# Altium PCB Electron_usinageESEO.PCBDOC
Units mil, origin at the board's own origin, x right, y up, seen from the top; angles counter-clockwise.
Board outline 3543.31 x 2755.91 mil, 2 copper layers (TopLayer, BottomLayer); 53 components, 39 nets, 173 pads, 31 vias.
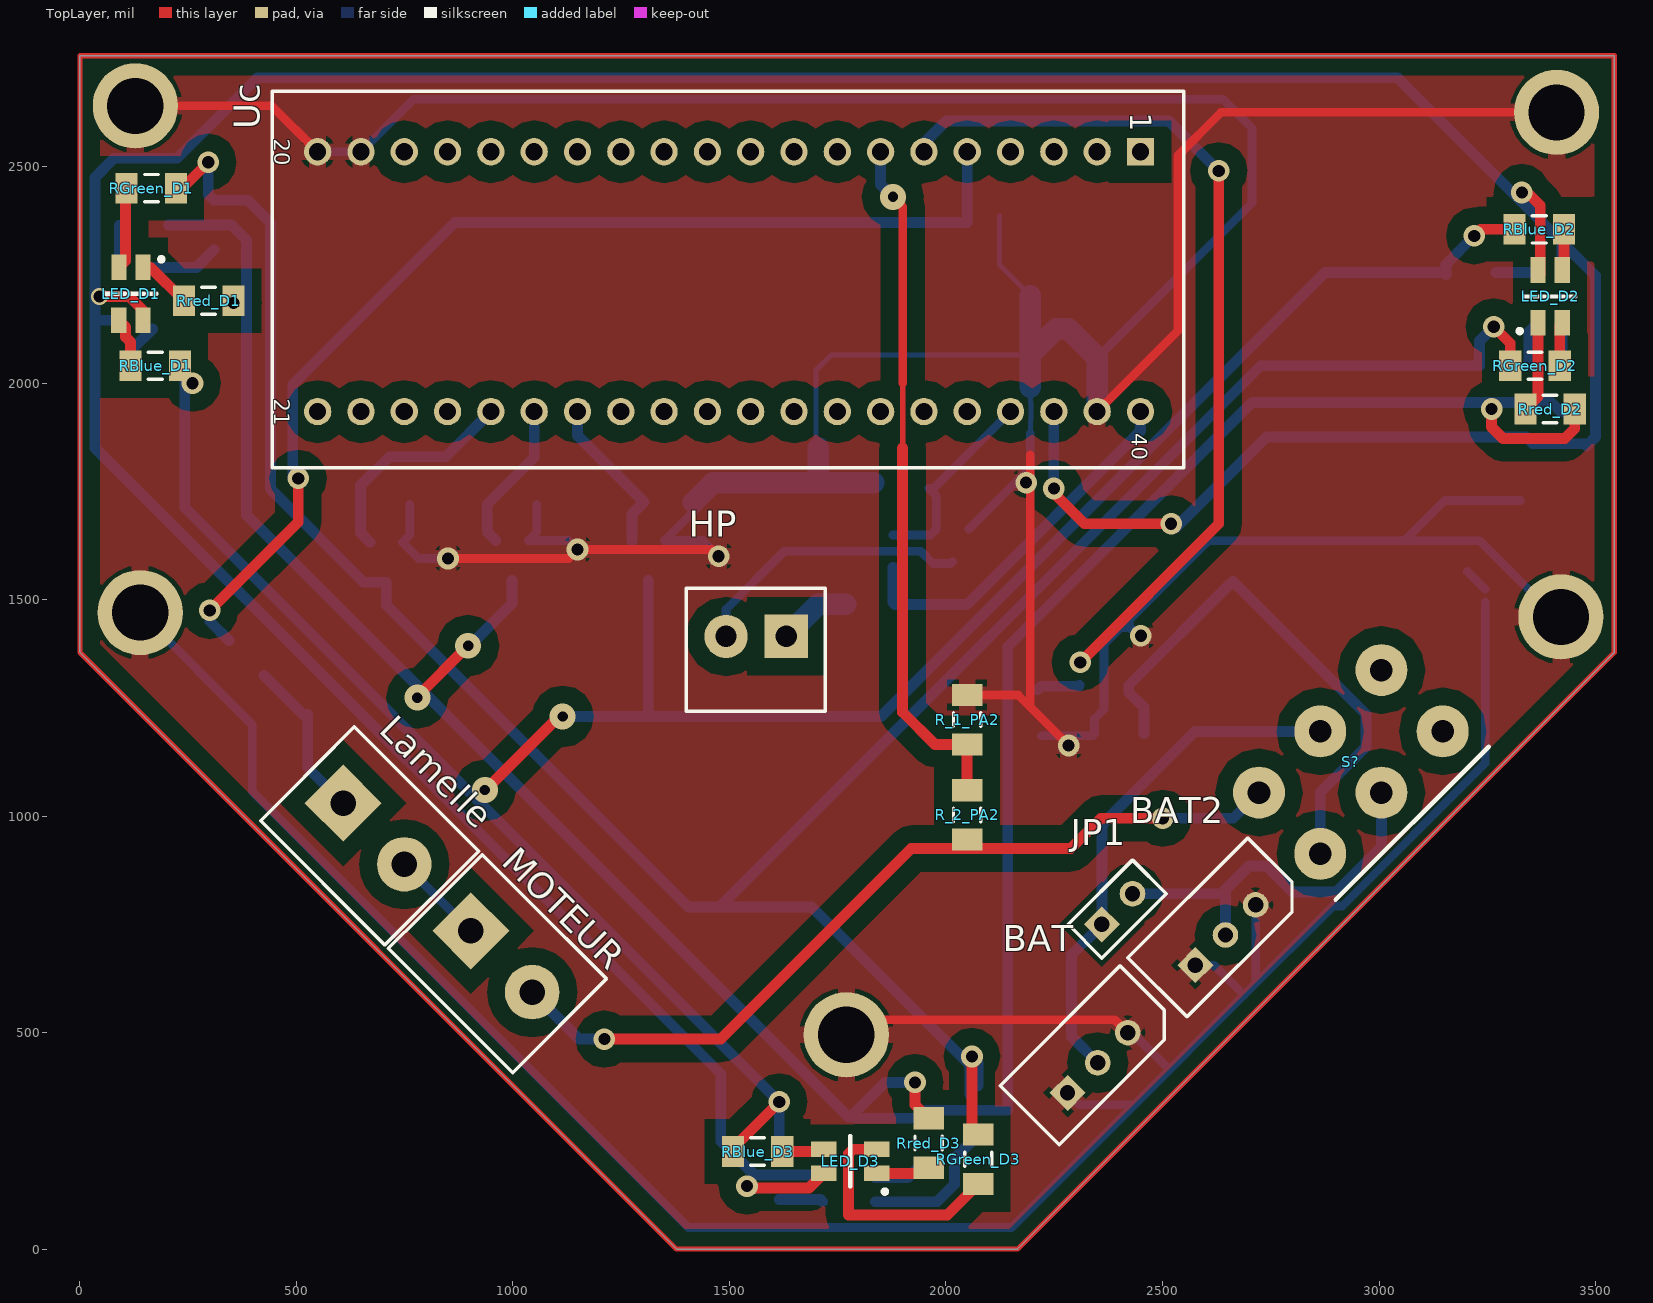
[diagram p0: TopLayer view]
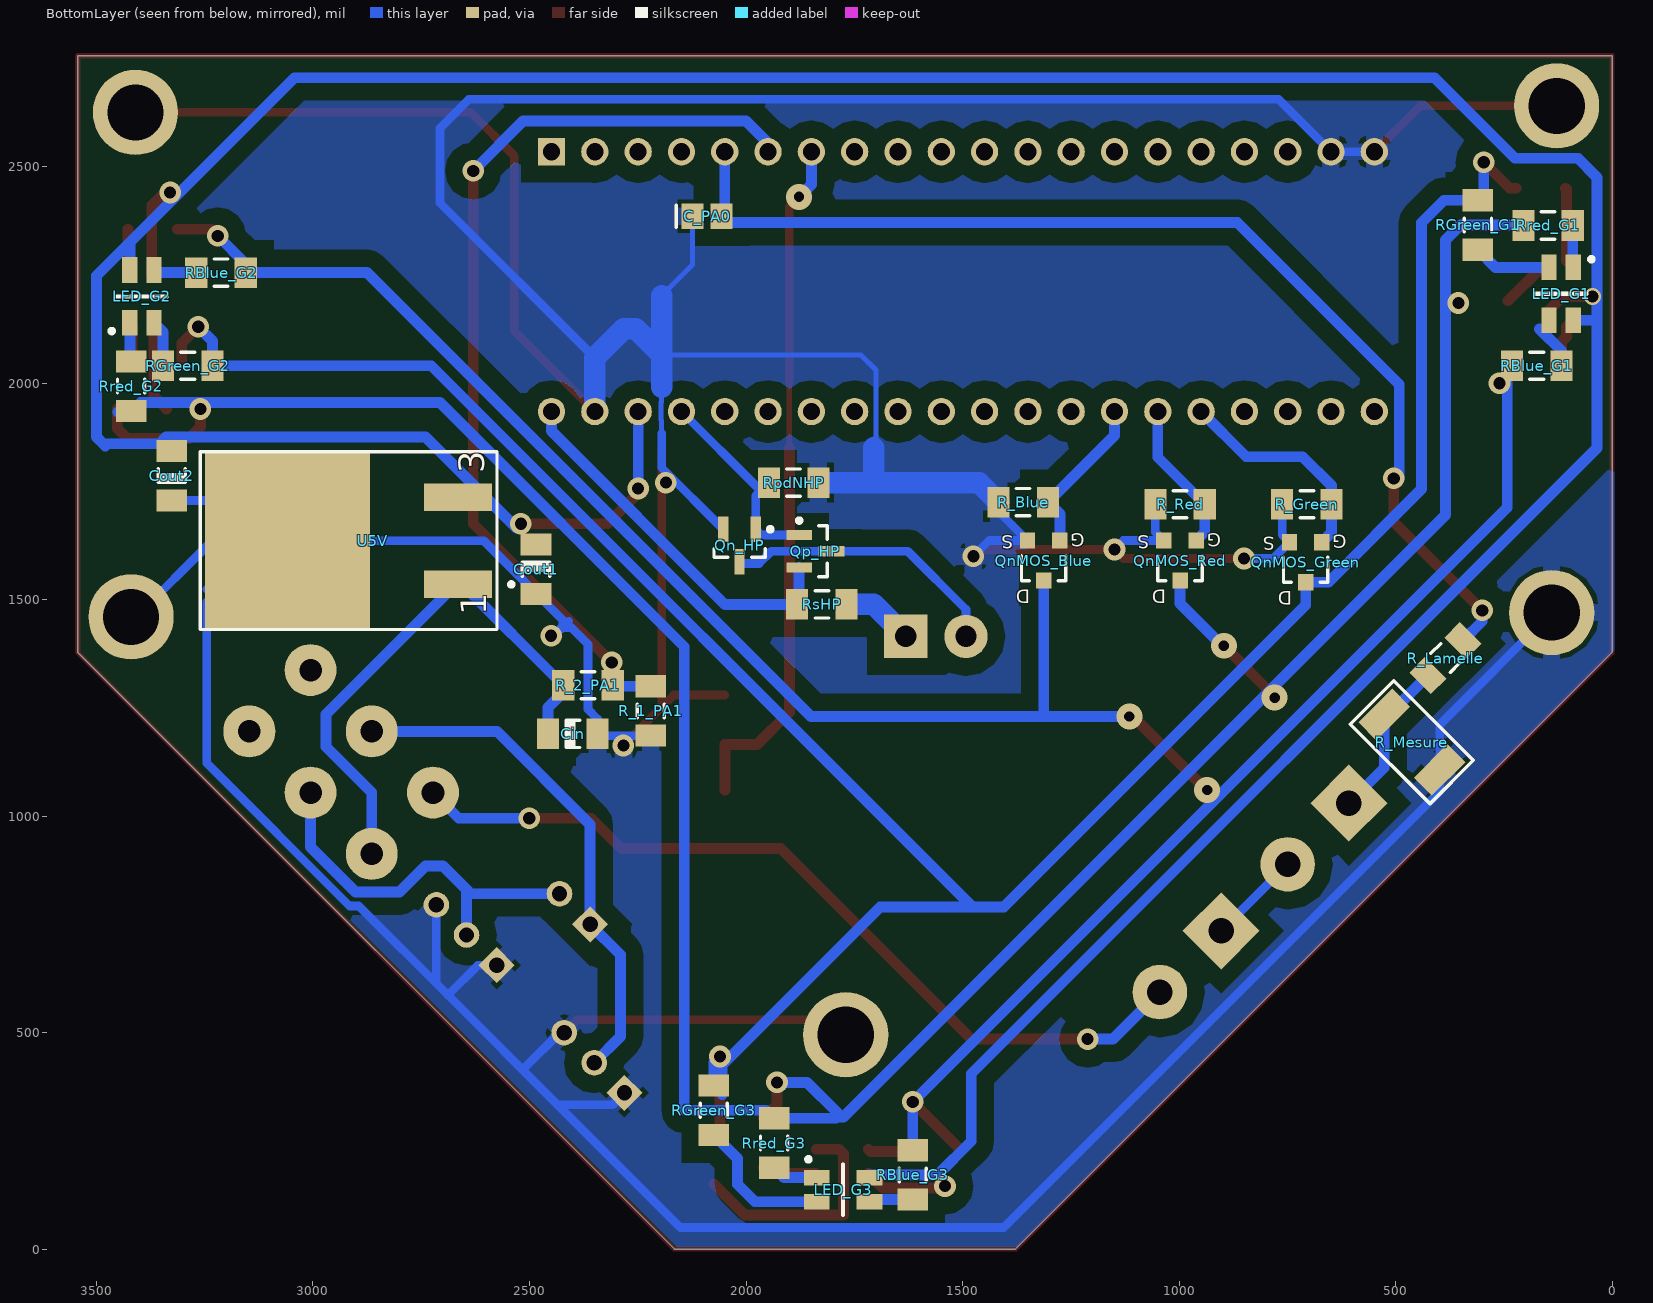
[diagram p1: BottomLayer view, seen from below]

## Layer stack, top to bottom
TopSolder: solder mask 0.4, Solder Resist, Dk 3.5
TopLayer: signal copper 1.4
Dielectric1: core 12.6, FR-4, Dk 4.8
BottomLayer: signal copper 1.4
BottomSolder: solder mask 0.4, Solder Resist, Dk 3.5

## Board outline
1377.95,0 0,1377.95 0,2755.91 3543.31,2755.91 3543.31,1377.95 2165.35,0

## Design rules (kind name [scope] priority, off if disabled: settings)
Clearance Clearance_1 [InNamedPolygon('BottomLayer-GND') Or  InNamedPolygon('TopLayer-GND')] p1: gap=40
Clearance PowerPlaneClearance [InNamedPolygon('Bot-GND') Or  InNamedPolygon('Top-GND')] p2: gap=40
Clearance [All] p3: gap=10
FabricationTestPointUsage TestPointUsage [All] p1: valid=0 allowmultiple=FALSE
FabricationTestpoint Testpoint [All] p1: side=3 testpointundercomponent=TRUE minsize=40 maxsize=100 preferedsize=60 minholesize=20 maxholesize=40 preferedholesize=32 testpointgrid=1 allowsidetop=TRUE allowsidebottom=TRUE usegrid=TRUE gridtolerance=0.01
Height [All] p1: minheight=0 maxheight=2000 prefheight=500
HoleSize [All] p1: absolutevalues=TRUE maxlimit=300 minlimit=1 maxpercent=80.000 minpercent=20.000
PlaneClearance [All] p1: clearance=40
PlaneConnect [All] p1: planeconnectstyle=Relief reliefexpansion=19.68 reliefentries=4 reliefconductorwidth=40 reliefairgap=19.68
PolygonConnect [All] p1: connectstyle=Relief reliefconductorwidth=40 reliefentries=4 polygonreliefangle="90 Angle" airgapwidth=10
RoomDefinition Electron [InComponentClass('Electron')] p1: confinementstyle=ConfineIn formatcopy=TRUE lockcomponents=FALSE outline -2655,7695 -1795,7695 -1795,8225 -2655,8225
RoutingVias [All] p1: holewidth=23.62 width=60 viastyle="Through Hole" minholewidth=23.62 minwidth=60 maxholewidth=23.62 maxwidth=60
SilkToSolderMaskClearance SilkscreenOverComponentPads [IsPad] p1: minsilkscreentomaskgap=10 clearancetoexposedcopper=TRUE
SolderMaskExpansion [All] p1: expansion=2
Width [All] p1: maxlimit=1000 minlimit=11 preferedwidth=40
22 further rules are at their usual default settings.

## Components (designator, comment, footprint, x,y, rotation, side; value= is the part's Value field where it differs from the comment)
BAT "MOLEX 22-03-5035" MOLEX3_2.5MM 2420,500 r225 top
BAT2 "MOLEX 22-03-5035" MOLEX3_2.5MM 2715,795 r225 top
C_PA0 "CMS_0805" C0805_N 2090,2385 r180 bottom
Cin "CONDENSATEUR_POL_ELECTROLY_RAD_2.0/5.08" C1206_N 2400,1190 r180 bottom
Cout1 "CONDENSATEUR_POL_ELECTROLY_RAD_2.0/5.08" C1206_N 2485,1570 r270 bottom
Cout2 "CONDENSATEUR_CER_RAD_5.08" C1206_N 3326.1,1786 r90 bottom
HP "BORNIER_2V_3.5MM" BORNIER_2V_3.5MM 1630,1415 r180 top
JP1 "JUMPER2" BARRETTE_2_M_D 2360,750 r45 top
Lamelle "BORNIER2 DROIT A VIS" BORNIER2_A_VIS 607.86,1030 r315 top
LED_D1 "150141M173100" 3528 118.09,2206.02 r270 top
LED_D2 "150141M173100" 3528 3394.9,2200 r90 top
LED_D3 "150141M173100" 3528 1778.98,202.85 r180 top
LED_G1 "150141M173100" 3528 117.99,2206.02 r270 bottom
LED_G2 "150141M173100" 3528 3395,2200 r90 bottom
LED_G3 "150141M173100" 3528 1775.87,137.4 r180 bottom
MOTEUR "BORNIER2 DROIT A VIS" BORNIER2_A_VIS 902.86,735 r315 top
Qn_HP "Transistor MOSFET-N" SOT23-3N 2015,1625 r270 bottom
QnMOS_Blue "TRANSISTOR_MOSFET-N_SOT23_GSD" TRANSISTOR_MOSFET-N_SOT23_GSD 1312.63,1590 r0 bottom
QnMOS_Green "TRANSISTOR_MOSFET-N_SOT23_GSD" TRANSISTOR_MOSFET-N_SOT23_GSD 707.63,1586.26 r0 bottom
QnMOS_Red "TRANSISTOR_MOSFET-N_SOT23_GSD" TRANSISTOR_MOSFET-N_SOT23_GSD 997.63,1590 r0 bottom
Qp_HP "Transistor MOSFET-P" SOT23-3N 1840,1611.66 r180 bottom
R_1_PA1 "RESISTANCE_CMS_1206" R1206_N 2220,1242.91 r90 bottom
R_1_PA2 "RESISTANCE_CMS_1206" R1206_N 2048.96,1222.69 r270 top
R_2_PA1 "RESISTANCE_CMS_1206" R1206_N 2365,1302.09 r0 bottom
R_2_PA2 "RESISTANCE_CMS_1206" R1206_N 2048.92,1002.69 r270 top
R_Blue "RESISTANCE_CMS_1206" R1206_N 1359.92,1725 r180 bottom
R_Green "RESISTANCE_CMS_1206" R1206_N 705,1720 r0 bottom
R_Lamelle "RESISTANCE_CMS_1206" R1206_N 385,1365 r135 bottom
R_Mesure "RESISTANCE_CMS_1206" INDUCTANCE_CMS_1812 390,1115 r45 bottom
R_Red "RESISTANCE_CMS_1206" R1206_N 997.63,1720.04 r0 bottom
RBlue_D1 "100" R1206_N 174.02,2040.04 r180 top
RBlue_D2 "100" R1206_N 3370,2355 r0 top
RBlue_D3 "100" R1206_N 1565,225.31 r0 top
RBlue_G1 "100" R1206_N 174.02,2040.04 r180 bottom
RBlue_G2 "100" R1206_N 3212.4,2255.04 r0 bottom
RBlue_G3 "100" R1206_N 1614.97,171.46 r270 bottom
RGreen_D1 "470" R1206_N 165,2450 r180 top
RGreen_D2 "470" R1206_N 3360.12,2040 r0 top
RGreen_D3 "470" R1206_N 2074.68,207.6 r270 top
RGreen_G1 "470" R1206_N 310,2365 r270 bottom
RGreen_G2 "470" R1206_N 3289.17,2040 r0 bottom
RGreen_G3 "470" R1206_N 2074.68,320.75 r270 bottom
RpdNHP "RESISTANCE_CMS_1206" R1206_N 1890,1770 r0 bottom
Rred_D1 "220" R1206_N 297.46,2190 r180 top
Rred_D2 "220" R1206_N 3395,1940 r180 top
Rred_D3 "220" R1206_N 1960,245 r270 top
Rred_G1 "220" R1206_N 147.85,2364.02 r180 bottom
Rred_G2 "220" R1206_N 3420,1992.91 r90 bottom
Rred_G3 "220" R1206_N 1935,245 r270 bottom
RsHP "RESISTANCE_CMS_1206" R1206_N 1825,1488.92 r0 bottom
S? "INTERRUPTEUR_BIPOLAIRE_COUDE_A_LEVIER" INTER_BIPOL_COUD_LEVIERGD 2935,1125 r315 top
U5V "Regulateur MC7805CD2T" "D2Pak (134)" 2665,1535.91 r90 bottom
Uc "STM32F103C8T6/PCB_DIP40" STM32F103C8T6_DIP40 2449.09,2534.09 r270 top

## Footprints (in the part's own frame and the unit in brackets; to place one, negate y for a bottom-side part, rotate by r counter-clockwise, add the part's x,y. Pads: shape width x height; smd on the part's side, far side on the other; paste and mask are expansions set on the pad)
3528 [mm] "Chip LED, 4-Leads, Body 2.8x3.5mm (max), Pitch 1.42mm, IPC Medium Density"
  rect 1.5x0.9 smd: 1(1.55,0.708) 2(1.55,-0.71) 3(-1.55,0.708) 4(-1.55,-0.708)
  silkscreen extent -2.15,-1.5 0.03,1.9, body extent -2.36,-2.22 2.37,2.22, height 1.87
BARRETTE_2_M_D [mm] "BARRETTE 2 CONTACTS ; 1 RANGEE ; DROITE ; MALE ; ESPACEMENT BROCHES = 2.54 mm"
  rect 1.5x1.5 hole 0.9: 1(0,0)
  round 1.5 hole 0.9: 2(2.54,0)
  silkscreen extent -1.4,-1.4 3.94,1.4, body extent -1.3,-1.2 3.78,1.3, height 8.55
BORNIER2_A_VIS [mm] "BORNIER 2 PLOTS A VIS ; VERTICAL ; ESPACEMENT BROCHES = 5.08mm"
  rect 3.2x3.2 hole 1.5: 1(0,0)
  round 3.2 hole 1.5: 2(5.08,0)
  silkscreen extent -2.69,-4.15 7.62,3.63, body extent -2.5,-4 7.5,3.5, height 10
BORNIER_2V_3.5MM [mm]
  rect 2.54x2.54 hole 1.25: 1(-0.025,0)
  round 2.54 hole 1.25: 2(3.5,0)
  silkscreen extent -2.31,-2.82 5.84,4.39, body extent -2.27,-5.08 5.83,5.32, height 21.81
C0805_N [mm] "Chip Capacitor, Body 2.0x1.3mm, IPC Medium Density"
  rect 1.3x1.5 smd: 1(-0.85,0) 2(0.85,0)
  silkscreen extent -1.8,-0.65 -1.8,0.65, body extent -0.99,-0.63 1.01,0.63, height 0.8
C1206_N [mm] "Chip Capacitor, Body 3.2x1.6mm, IPC Medium Density"
  rect 1.3x1.8 smd: 1(-1.45,0) 2(1.45,0)
  silkscreen extent -0.4,-0.8 0.4,0.8, body extent -1.57,-0.81 1.63,0.79, height 1.02
"D2Pak (134)" [mm] "D2-PAK; 3 Leads (1 Cropped); Body 15.2 (inc. leads) x 10.9 mm (LxW max)"
  rect 1.61x4 smd: 1(0,0) 3(5.08,0)
  rect 10.49x9.68 smd: 4(2.54,10)
  silkscreen extent -2.67,-3.25 7.75,15.11, body extent -2.66,-1.8 7.74,14.05, height 4.6
INDUCTANCE_CMS_1812 [mm] "INDUCTANCE CMS 1812 ; DIMENSIONS : 4.5mm x 3.2mm"
  rect 1.5x2.8 smd: 1(0,0.3) 2(4.6,0.3)
  silkscreen extent -1,-1.5 5.6,2.1, body extent 0.05,-1.3 4.55,1.9, height 3.24
INTER_BIPOL_COUD_LEVIERGD [mil] "INTERRUPTEUR BIPOLAIRE COUDE A LEVIER; DEPLACEMENT GAUCHE DROITE ; 25.4mm x 12.7mm ; ESPACEMENTS BROCHES : 5.08mm"
  round 120 hole 52: 1(100,200) 2(100,0) 3(100,-200) 4(-100,200) 5(-100,0) 6(-100,-200)
  silkscreen extent 200,-250 200,250
MOLEX3_2.5MM [mm] "Ref Molex : 22-03-5035 - 3 voies - 2.5mm"
  rect 1.5x1.5 hole 0.9: 1(5,0)
  round 1.5 hole 0.9: 2(2.5,0) 3(0,0)
  silkscreen extent -2.45,-3.1 7.49,1.8, body extent -2.46,-3.05 7.44,1.85, height 5.92
R1206_N [mm] "Chip Resistor, Body 3.2x1.6mm, IPC Medium Density"
  rect 1.3x1.8 smd: 1(-1.45,0) 2(1.45,0)
  silkscreen extent -0.4,-0.8 0.4,0.8, body extent -1.68,-0.87 1.68,0.87, height 0.71
SOT23-3N [mm] "SOT23, 3-Leads, Body 2.9x1.3mm, Pitch 0.95mm, Lead Span 2.5mm, IPC Medium Density"
  rect 1.5x0.6 smd: 1(-0.95,0.95) 2(-0.95,-0.95) 3(0.95,0)
  silkscreen extent -1.07,-1.5 0.7,1.92, body extent -1.24,-1.5 1.23,1.5, height 1.1
STM32F103C8T6_DIP40 [mm] "STM32F103 monté sur DIP40"
  rect 1.6x1.6 hole 1: 1(0,0)
  round 1.6 hole 1: 2(0,-2.54) 3(0,-5.08) 4(0,-7.62) 5(0,-10.16) 6(0,-12.7) 7(0,-15.24) 8(0,-17.78) 9(0,-20.32) 10(0,-22.86) 11(0,-25.4) 12(0,-27.94) 13(0,-30.48) 14(0,-33.02) 15(0,-35.56) 16(0,-38.1) 17(0,-40.64) 18(0,-43.18) 19(0,-45.72) 20(0,-48.26) 21(15.24,-48.26) 22(15.24,-45.72) 23(15.24,-43.18) 24(15.24,-40.64) 25(15.24,-38.1) 26(15.24,-35.56) 27(15.24,-33.02) 28(15.24,-30.48) 29(15.24,-27.94) 30(15.24,-25.4) 31(15.24,-22.86) 32(15.24,-20.32) 33(15.24,-17.78) 34(15.24,-15.24) 35(15.24,-12.7) 36(15.24,-10.16) 37(15.24,-7.62) 38(15.24,-5.08) 39(15.24,-2.54) 40(15.24,0)
  silkscreen extent -3.56,-50.92 18.54,2.54, body extent -3.63,-51.04 18.37,6.1, height 20.63
TRANSISTOR_MOSFET-N_SOT23_GSD [mm] "SOT23 ; DIMENSIONS : 3.0mm x 2.5 mm"
  rect 0.9x0.95 smd: 1(-0.95,-1.175) 2(0.95,-1.175) 3(0,1.175)
  silkscreen extent -1.3,-0.3 1.3,1.18, body extent -1.5,-1.57 1.5,1.57, height 1.1

## Part data
BAT BAT2: library part BARRETTE3, "Header, 3-Pin"
C_PA0: library part CONDENSATEUR_CMS_CER_0805, "CONDENSATEUR CMS CERAMIQUE 0805"
Cin Cout1: "CONDENSATEUR POLARISE ELECTROLYTIQUE RADIAL 2.0/5.08"
Cout2: "CONDENSATEUR TRAVERSANT CERAMIQUE RADIAL 5.08mm"
JP1: "BARRETTE 2 CONTACTS 1 RANGEE MALE DROITE"
Lamelle MOTEUR: library part "BORNIER2_DROIT_A VIS", "BORNIER 2 PLOTS DROIT A VIS 5.08mm"
LED_D1 LED_D2 LED_D3 LED_G1 LED_G2 LED_G3: library part "WL-SFTW 3528 150141M173100", "SMD Full-Color Top LED, WL-SFTW, Red & Green & Blue"
Qn_HP: "N-Channel MOSFET"
QnMOS_Blue QnMOS_Green QnMOS_Red: "TRANSISTOR MOSFET CANAL N BOITIER SOT23_GSD"
Qp_HP: "P-Channel MOSFET"
R_1_PA1 R_1_PA2 R_2_PA1 R_2_PA2 R_Blue R_Green R_Lamelle R_Mesure R_Red RpdNHP RsHP: "RESISTANCE CMS 1206"
RBlue_D1 RBlue_D2 RBlue_D3 RBlue_G1 RBlue_G2 RBlue_G3 RGreen_D1 RGreen_D2 RGreen_D3 RGreen_G1 RGreen_G2 RGreen_G3 Rred_D1 Rred_D2 Rred_D3 Rred_G1 Rred_G2 Rred_G3: library part Resistor, "Resistor"
S?: "INTERRUPTEUR BIPOLAIRE COUDE A LEVIER ON/ON"
U5V: "Three-Terminal Positive Voltage Regulator"
Uc: "MICROCONTROLEUR 32 BITS - 72MHz - 34 I/O - 64 KO : FLASH - 20KO RAM - 10 CANAUX A/D 12 BITS - DIP40 - UART, SPI, I2C, USB, CAN"

## Free pads (board coordinates)
  round 196.85 hole 129.92: 1(128.17,2640) 2(3410,2625) 3(139.33,1470) 4(3420,1460) 5(1770,495)

## Via types
v1: diameter 50, hole 28, TopLayer to BottomLayer, 25 vias
v2: diameter 60, hole 23.62, TopLayer to BottomLayer, 5 vias
v3: diameter 39.37, hole 28, TopLayer to BottomLayer, 1 vias

## Nets (pads, with @x,y where several pads share a name; then routed paths per layer and width w, separated by ;. In a path a pad name is that pad's centre, name@x,y a point inside that pad or via, vN(x,y) a via of type N, cw(c..) or ccw(c..) an arc to the next point about the centre after c; other vN are vias at no path point)
+3V3: Qp_HP.2 RsHP.2 Uc.40 | length 865
  BottomLayer w25: Qp_HP.2 1877.4,1493.6 RsHP.2 2048.92,1488.92 2449.09,1889.09 Uc.40
+5V: Cout1.1 Cout2.2 LED_D1.1 LED_D2.1 LED_D3.1 LED_G1.1 LED_G2.1 LED_G3.1 U5V.3 Uc.38 | length 9448.7
  TopLayer w25: v3(45,2200) 114.2,2200 145.95,2168.26 LED_D1.1 ; v1(1540.57,145.59) 1545.26,140.9 1683.86,140.9 LED_D3.1 ; v1(2249.09,1756.5) 2249.09,1745.91 2320,1675 v1(2520,1675) ; v1@3331.07,2451.07 3372.15,2410 LED_D2.1@3372.15,2251.04
  BottomLayer w25: LED_G1.1@92.15,2147.01 LED_G1.1 35,2145 ; LED_G3.1@1714.85,171.46 1557.8,171.46 1480,249.25 1480,404.92 35,1849.92 35,2145 ; v1(2249.09,1756.5) Uc.38 ; v1@2530,1665 2740.31,1875.31 3339.69,1875.31 3355,1860 3484.69,1860 ; LED_G2.1 3422.85,2325 ; 3479.69,1855 3500,1875.31 3500,2247.85 3422.85,2325 ; 35,2145 35,2475 79.07,2519.07 224.07,2519.07 410,2705 3042.85,2705 3422.85,2325
  other v1: 3329.82,2440
Blue: QnMOS_Blue.3 RBlue_D1.1 RBlue_D2.1 RBlue_D3.1 RBlue_G1.1 RBlue_G2.1 RBlue_G3.1 | length 5746.9
  TopLayer w25: v2@956.6,1080 v2@1107.67,1231.07 ; RBlue_D3.1 1507.91,232.98 v1(1614.97,340.03) ; v1(3220,2340) 3235,2355 RBlue_D2.1
  BottomLayer w25: RBlue_G1.1@242.09,2040 242.09,1712.91 v1(1614.97,340.03) RBlue_G3.1 ; v2(1115,1230) 1312.63,1230 ; QnMOS_Blue.3 1312.63,1230 ; RBlue_G2.1@3154.41,2250 RBlue_G2.1@3154.41,2255.04 ; v1(3220,2340) 3154.41,2274.41 RBlue_G2.1@3154.41,2255.04 ; 1312.63,1230 1850,1230 2875.04,2255.04 RBlue_G2.1@3154.41,2255.04
  other v1: 260.2,1999.61
  other v2: 935,1060
GND: BAT2.1 BAT2.3 BAT.1 BAT.3 C_PA0.1 Cin.2 Cout1.2 Cout2.1 pad.1 pad.2 pad.3 pad.4 pad.5 Qn_HP.2 QnMOS_Blue.2 QnMOS_Green.2 QnMOS_Red.2 R_1_PA1.1 R_1_PA2.1 R_Blue.1 R_Green.2 R_Mesure.1 R_Red.2 RpdNHP.1 U5V.4 Uc.19 Uc.20 Uc.39 | length 17377.3
  TopLayer w20: pad.1 443.19,2640 Uc.20 ; v1(850,1595) 1128.49,1595 v1(1149.09,1615.6) 1459.4,1615.6 v1(1475,1600) ; pad.5 1805,530 2390,530 BAT.3 ; R_1_PA2.1 2166.38,1279.77 2195,1251.15 ; 2195,1834.69 2195,1251.15 ; v1(2283.28,1162.87) 2195,1251.15 ; Uc.39 2535,2120 2535,2525 2635,2625 pad.2
  BottomLayer w12: 1704.92,1850 1700,1854.92 1700,2030 1735,2065 2195,2065 ; C_PA0.1 2123.46,2273.07 2195,2201.54 ; 2195,1884.09 2195,1912.83 2196.59,1914.42 2196.59,1955.36 2195,1956.95 2195,1990
  BottomLayer w20: pad.3 398.35,1210.98 R_Mesure.1 398.35,1056.65 1405,50 2151.71,50 2435.3,333.58 ; Uc.20 Uc.19 770,2655 2640,2655 2706.61,2588.39 2706.61,2415.99 2349.09,2058.47 ; R_Green.2 762.09,1649.57 QnMOS_Green.2 782.55,1595 v1(850,1595) ; R_Red.2 1054.72,1655.94 QnMOS_Red.2 1128.44,1636.26 v1(1149.09,1615.6) ; R_Blue.1 1417.01,1703.23 QnMOS_Blue.2 1438.74,1636.26 v1(1475,1600) ; Qn_HP.2 2195,1805 2195,1884.09 ; R_1_PA1.1 2338.74,1185.83 Cin.2 2342.91,1224.41 2365,1246.49 2365,1396.74 2402.89,1434.63 2427.73,1434.63 ; BAT.1 2308.03,333.58 2435.3,333.58 ; 2409.63,1449.84 2423.03,1436.44 ; BAT.3 2430,500 2512.5,417.5 ; 2427.73,1431.74 2423.03,1436.44 ; BAT2.1@2575.81,642.48 BAT2.1 2619.19,655.81 2688.36,586.64 ; 2715,618.29 BAT2.3 ; U5V.4@3203.61,1565 U5V.4@3245,1523.61 ; U5V.4@3245,1495 3245,1122.07 2915.43,792.5 2894.21,792.5 2688.36,586.64 ; Cout2.1 3151.71,1728.91 U5V.4 ; pad.4 3408.5,1460 3232.6,1635.91 U5V.4 ; 2423.03,1436.44 2423.03,1453.03 2605.91,1635.91 U5V.4 ; 2435.3,333.58 2688.36,586.64
  BottomLayer w50: R_Blue.1 1462.01,1770 1704.92,1770 ; 1704.92,1850 1704.92,1770 ; RpdNHP.1 1704.92,1770 ; 2195,1990 2195,2065 ; 2195,2201.54 2195,2065 ; Uc.39 2349.09,2058.47 2282.56,2125 2255,2125 2195,2065
  other v1: 2450,1416.44 2185,1770
Green: QnMOS_Green.3 RGreen_D1.1 RGreen_D2.1 RGreen_D3.1 RGreen_G1.1 RGreen_G2.1 RGreen_G3.1 | length 5965.8
  TopLayer w25: RGreen_D1.1 236.48,2450 v1(296.48,2510) ; v1(2060,445) 2060,279.37 RGreen_D3.1 ; v1(3265,2130) 3303.03,2091.97 RGreen_D2.1
  BottomLayer w25: v1(296.48,2510) 296.48,2435.61 RGreen_G1.1 387.91,2422.09 440,2370 440,1755 655,1540 QnMOS_Green.3 707.63,1487.37 1405,790 ; 1405.04,790.04 1689.96,790.04 2055,425 RGreen_G3.1@2055,357.09 ; 1477.01,790.04 2726.97,2040 RGreen_G2.1 3232.09,2097.09 v1(3265,2130) ; v1(2060,445) 2074.68,430.32 RGreen_G3.1
NetBAT2_2: BAT2.2 JP1.2 S?.2 | length 900
  BottomLayer w25: JP1.2 2635.71,820.71 2645.4,830.4 ; BAT2.2 2645.4,830.4 ; S?.2 3005.71,928.74 2901.97,825 2800,825 2740,885 2700,885 2645.4,830.4
NetBAT_2: BAT.2 JP1.1 S?.5 | length 1197.5
  BottomLayer w25: BAT.2 2290,490.81 2290,680 JP1.1 2360,980.49 2575.22,1195.71 S?.5
NetHP_1: HP.1 RsHP.1 | length 167.5
  BottomLayer w50: HP.1 1704.92,1488.92 RsHP.1
NetHP_2: HP.2 Qn_HP.3 Qp_HP.3 | length 654.2
  BottomLayer w20: HP.2 1492.2,1477.31 1626.56,1611.66 Qp_HP.3 1941.72,1611.66 1970,1583.39 2010.79,1583.39 Qn_HP.3
NetLamelle_1: Lamelle.1 R_Lamelle.1 R_Mesure.2 | length 376.7
  BottomLayer w25: R_Lamelle.1 515.29,1234.71 R_Mesure.2 526.41,1111.45 Lamelle.1
NetLamelle_2: Lamelle.2 MOTEUR.1 | length 217.2
  BottomLayer w20: Lamelle.2 MOTEUR.1
NetLED_D1_2: LED_D1.2 RBlue_D1.2 | length 116.1
  TopLayer w25: LED_D1.2 105.73,2129.41 105.73,2106.15 116.93,2094.95 RBlue_D1.2
NetLED_D1_3: LED_D1.3 Rred_D1.2 | length 133.5
  TopLayer w25: LED_D1.3@150.98,2262.01 LED_D1.3 163.33,2267.05 Rred_D1.2
NetLED_D1_4: LED_D1.4 RGreen_D1.2 | length 190.3
  TopLayer w25: LED_D1.4 105.73,2282.54 105.73,2447.82 RGreen_D1.2
NetLED_D2_2: LED_D2.2 RBlue_D2.2 | length 95.7
  TopLayer w25: LED_D2.2 3427.09,2265.26 RBlue_D2.2
NetLED_D2_3: LED_D2.3 Rred_D2.2 | length 211.1
  TopLayer w25: Rred_D2.2 3367.15,1969.23 LED_D2.3@3367.15,2138.98
NetLED_D2_4: LED_D2.4 RGreen_D2.2 | length 101.3
  TopLayer w25: RGreen_D2.2 3417.2,2133.42 LED_D2.4
NetLED_D3_2: LED_D3.2 RBlue_D3.2 | length 98.1
  TopLayer w25: RBlue_D3.2 1712.46,225.31 LED_D3.2
NetLED_D3_3: LED_D3.3 Rred_D3.2 | length 125.3
  TopLayer w25: LED_D3.3 1947.09,175 Rred_D3.2
NetLED_D3_4: LED_D3.4 RGreen_D3.2 | length 538.1
  TopLayer w25: LED_D3.4@1837.88,230.51 1785.03,230.51 1774.89,220.37 1774.89,78.94 2003.11,78.94 RGreen_D3.2
NetLED_G1_2: LED_G1.2 RBlue_G1.2 | length 105.9
  BottomLayer w25: RBlue_G1.2 116.93,2074.39 167.54,2125
NetLED_G1_3: LED_G1.3 Rred_G1.2 | length 97.2
  BottomLayer w25: LED_G1.3 90.77,2267.68 Rred_G1.2
NetLED_G1_4: LED_G1.4 RGreen_G1.2 | length 181.1
  BottomLayer w25: LED_G1.4 269.13,2267.05 RGreen_G1.2
NetLED_G2_2: LED_G2.2 RBlue_G2.2 | length 100
  BottomLayer w25: RBlue_G2.2 3361.06,2255.04 LED_G2.2
NetLED_G2_3: LED_G2.3 Rred_G2.2 | length 90.2
  BottomLayer w25: Rred_G2.2 3422.85,2052.85 LED_G2.3
NetLED_G2_4: LED_G2.4 RGreen_G2.2 | length 107.6
  BottomLayer w25: RGreen_G2.2 3346.26,2118.09 LED_G2.4
NetLED_G3_2: LED_G3.2 RBlue_G3.2 | length 101.9
  BottomLayer w25: RBlue_G3.2 1709.93,114.37 LED_G3.2
NetLED_G3_3: LED_G3.3 Rred_G3.2 | length 107.5
  BottomLayer w25: LED_G3.3 1912.34,165.26 Rred_G3.2
NetLED_G3_4: LED_G3.4 RGreen_G3.2 | length 336.2
  BottomLayer w25: LED_G3.4 1979.55,109.55 2020,150 2020,208.98 RGreen_G3.2
NetMOTEUR_2: MOTEUR.2 R_2_PA2.2 S?.6 | length 1968.7
  TopLayer w25: v1(1211.25,485) 1480,485 1920,925 2287.97,925 2357.97,995 v1@2510,995
  BottomLayer w25: MOTEUR.2 1152.86,485 v1(1211.25,485) ; v1(2500.64,995) 2663.58,995 S?.6
PA0_ShuntMotor: C_PA0.2 R_Lamelle.2 Uc.5 | length 2570
  TopLayer w25: v1(300.04,1475) 504.14,1679.1 v1(504.14,1780)
  BottomLayer w25: v1(300.04,1475) 300.04,1449.96 R_Lamelle.2 ; v1@491.6,1780 491.6,1996.37 865.85,2370.62 2049.09,2370.62 Uc.5
PA1_MeasureBat: R_1_PA1.2 R_2_PA1.1 Uc.6 | length 2137.1
  TopLayer w25: v1(2310,1355) 2630,1675 v1(2630,2490)
  BottomLayer w25: Uc.6 1949.09,2554.09 2000,2605 2515,2605 v1(2630,2490) ; R_1_PA1.2@2212.09,1292.09 R_1_PA1.2 2305.83,1300 R_2_PA1.1
PA2_MEASUREBAT2: R_1_PA2.2 R_2_PA2.1 Uc.7 | length 1600.7
  TopLayer w12: 1900,1850 1900,2000
  TopLayer w20: v2(1877.4,2430) 1900,2407.4 1900,2000
  TopLayer w25: 1900,1850 1900,1240 1974.4,1165.6 R_1_PA2.2 ; R_2_PA2.1 R_1_PA2.2@2048.92,1165.56
  BottomLayer w25: Uc.7 1849.09,2458.31 v2(1877.4,2430)
PA8_PWM1: QnMOS_Green.1 R_Green.1 Uc.25 | length 511.9
  BottomLayer w25: QnMOS_Green.1 647.91,1654.84 R_Green.1 647.91,1763.19 714.72,1830 845,1830 Uc.25
PA9_PWM2: QnMOS_Red.1 R_Red.1 Uc.26 | length 351
  BottomLayer w25: QnMOS_Red.1 940.55,1655.94 R_Red.1 1049.09,1828.59 Uc.26
PA10_PWM3: QnMOS_Blue.1 R_Blue.2 Uc.27 | length 373
  BottomLayer w25: Uc.27 1149.09,1878.74 R_Blue.2 1275.23,1697.4 QnMOS_Blue.1
PB9_TMR4_CH4_PWM_HP: Qn_HP.1 Qp_HP.1 RpdNHP.2 Uc.37 | length 470.1
  BottomLayer w20: Qp_HP.1 1964.26,1649.07 Qn_HP.1 1977.6,1739.49 1960,1757.09 1972.09,1757.09 Uc.37
Red: QnMOS_Red.3 Rred_D1.1 Rred_D2.1 Rred_D3.1 Rred_G1.1 Rred_G2.1 Rred_G3.1 | length 6728.5
  TopLayer w25: v2@776.61,1273.39 v2(896.61,1393.39) ; v1(1928.5,385) 1928.5,333.58 Rred_D3.1 ; v1(3260,1940) 3260,1898.2 3286.17,1872.03 3429.04,1872.03 3452.09,1895.08 Rred_D2.1
  BottomLayer w25: Rred_G1.1@204.94,2365 350,2365 385,2330 385,1694.99 1774.99,305 1790,305 ; v2@898.31,1391.69 997.63,1491.02 QnMOS_Red.3 ; v1(1928.5,385) 1859.01,385 1790,315.99 1790,305 ; Rred_G2.1@3450,1932.91 3420,1932.91 3397.91,1955 2706.61,1955 2142.75,1391.13 2142.75,320.75 1953.66,320.75 Rred_G3.1 1792.91,302.09 1790,305
  other v1: 355,2185
  other v2: 779.17,1273.39
VCC: Cin.1 R_2_PA1.2 S?.3 U5V.1 | length 1267.1
  BottomLayer w25: Cin.1 2457.09,1250.43 2422.09,1285.43 R_2_PA1.2 2655.91,1535.91 U5V.1 ; U5V.1@2662.5,1542.5 2970,1235 2970,1160 2864.29,1054.29 S?.3
pads on no net: S?.1 S?.4 Uc.1 Uc.2 Uc.3 Uc.4 Uc.8 Uc.9 Uc.10 Uc.11 Uc.12 Uc.13 Uc.14 Uc.15 Uc.16 Uc.17 Uc.18 Uc.21 Uc.22 Uc.23 Uc.24 Uc.28 Uc.29 Uc.30 Uc.31 Uc.32 Uc.33 Uc.34 Uc.35 Uc.36
copper on no net: | length 10984.1
  TopLayer w11.81: 0,1377.95 1377.95,0 2165.35,0 3543.31,1377.95 3543.31,2755.91 0,2755.91 0,1377.95

## Polygon pours and split planes (outlines as drawn)
GND on TopLayer "TopLayer-GND" (solid, pour order 22): 0,2755.91 3543.31,2755.91 3543.31,1378.31 2167.4,2.4 2167.4,2.05 1375.91,2.05 0,1377.95
GND on BottomLayer "BottomLayer-GND" (solid, remove dead copper, pour order 20): 0,2755.45 5.45,2760.91 3538.31,2760.91 3538.31,1383.31 2160,5 1372.95,5 -5,1382.95 -5,2760

## Other copper
TopLayer:

## Text inside footprints (layer, text, board x,y; h text height)
QnMOS_Blue: BottomOverlay "G" at 1218.14,1652.99 h31.5 r180; BottomOverlay "S" at 1383.5,1649.06 h31.5 r180; BottomOverlay "D" at 1344.13,1523.07 h31.5 r180
QnMOS_Green: BottomOverlay "G" at 613.14,1649.25 h31.5 r180; BottomOverlay "S" at 778.5,1645.32 h31.5 r180; BottomOverlay "D" at 739.13,1519.33 h31.5 r180
QnMOS_Red: BottomOverlay "D" at 1029.13,1523.07 h31.5 r180; BottomOverlay "S" at 1068.5,1649.06 h31.5 r180; BottomOverlay "G" at 903.14,1652.99 h31.5 r180
U5V: BottomOverlay "1" at 2600,1463.91 h59.06 r270; BottomOverlay "3" at 2604,1791.91 h59.06 r270
Uc: TopOverlay "21" at 449.09,1964.09 h35.43 r270; TopOverlay "40" at 2429.09,1884.09 h35.43 r270; TopOverlay "20" at 449.09,2564.09 h35.43 r270; TopOverlay "1" at 2425.47,2624.65 h50 r270